# Altium PCB CS_PCB.PcbDoc
Units mil, origin at the board's own origin, x right, y up, seen from the top; angles counter-clockwise.
Board outline 2989 x 6254 mil, 2 copper layers (Top Layer, Bottom Layer); 87 components, 67 nets, 292 pads, 14 vias.
Unrouted connection lines stored in the file: 1.
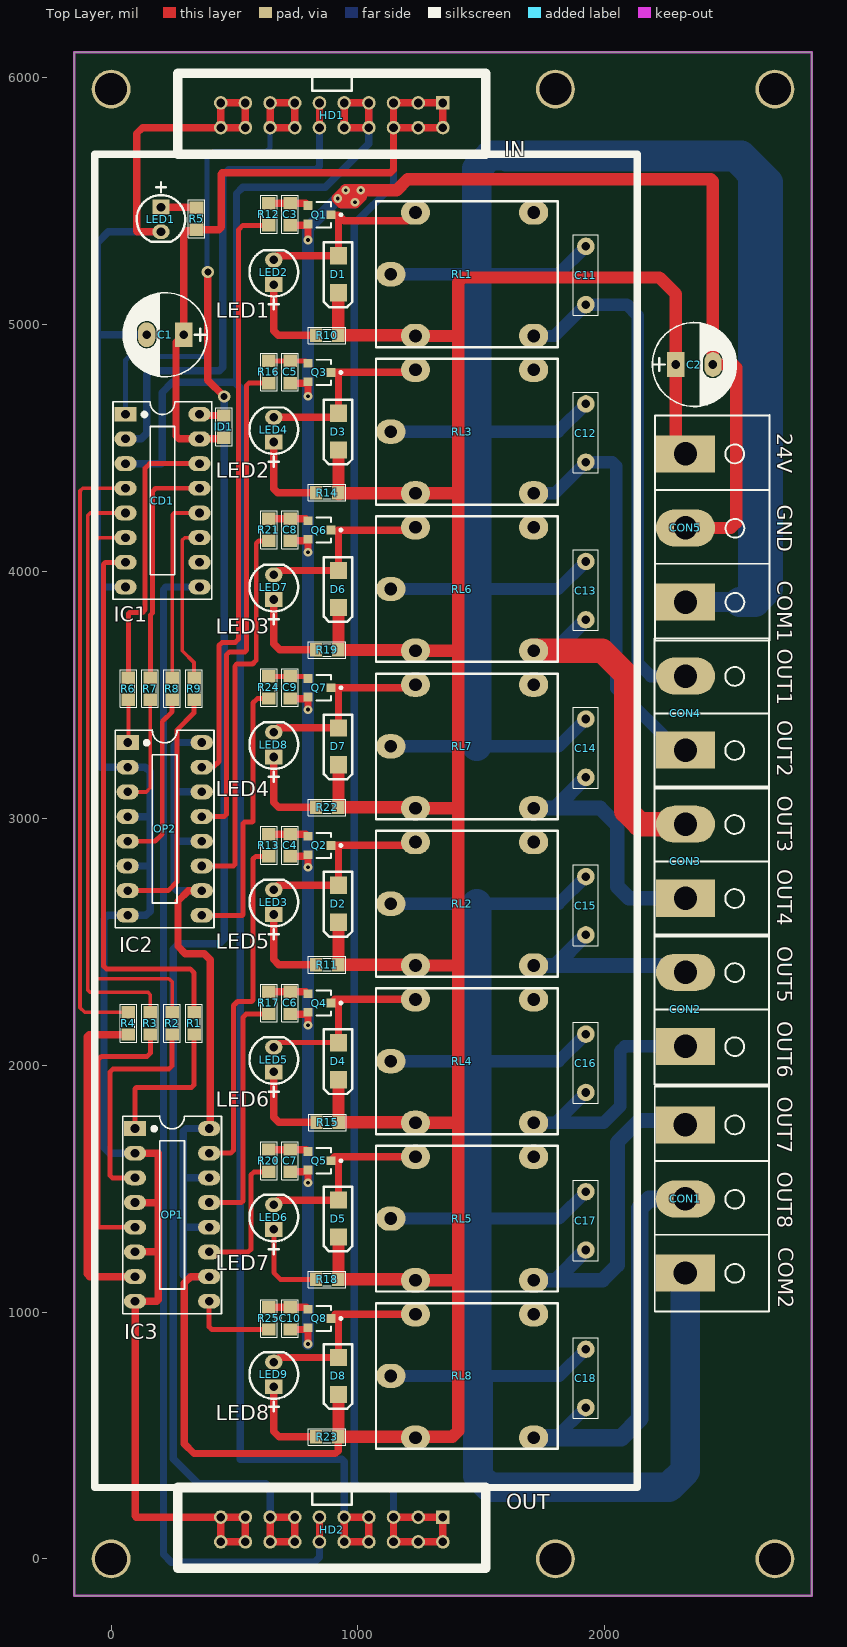
[diagram p0: Top Layer view]
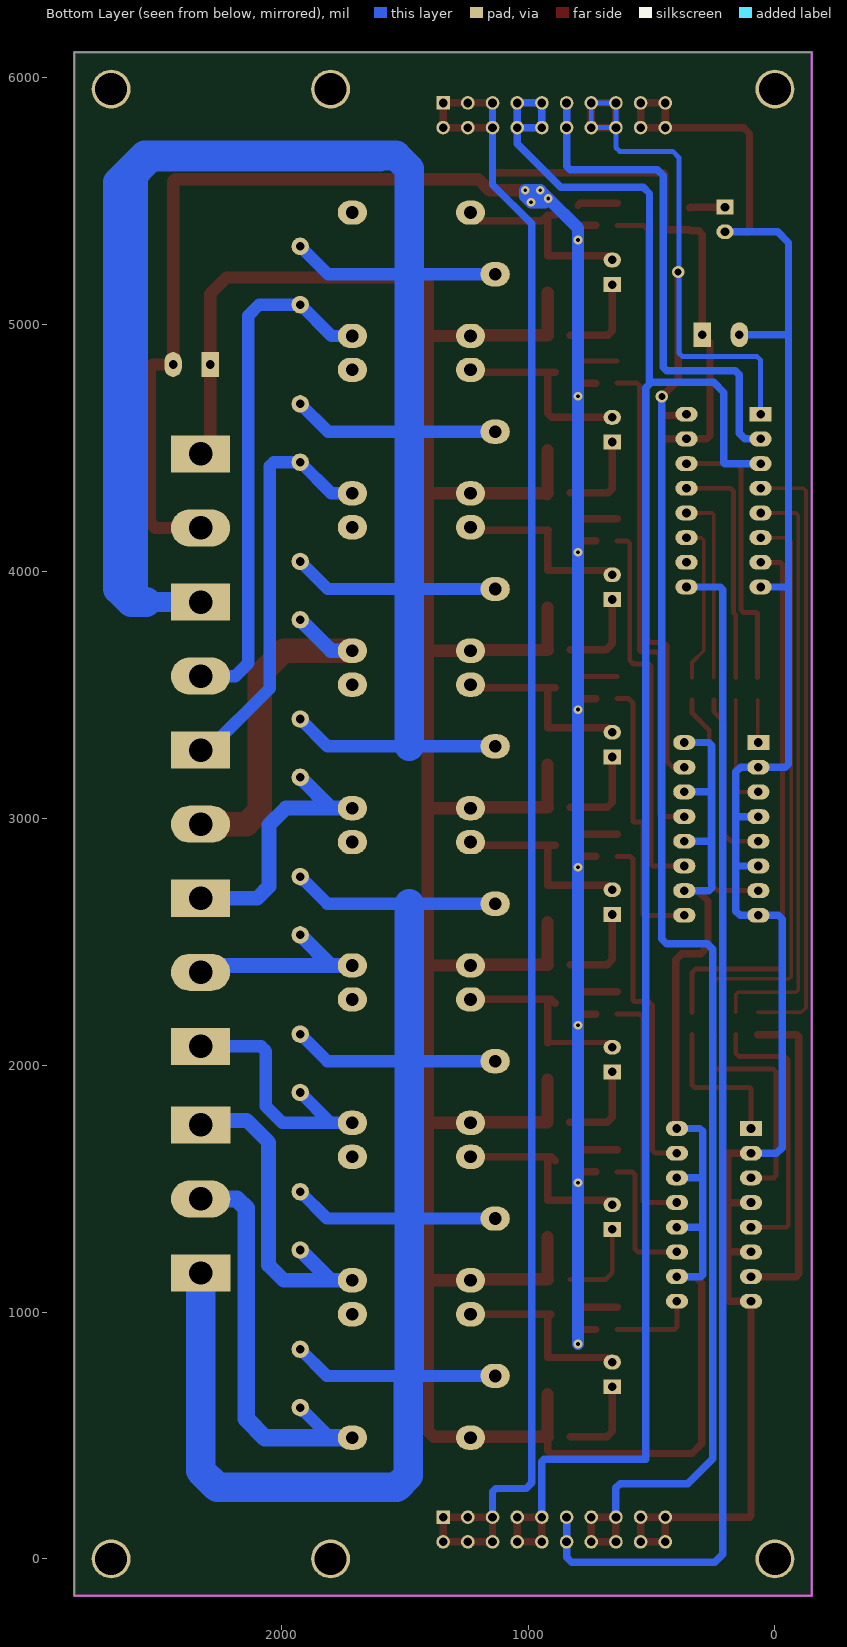
[diagram p1: Bottom Layer view, seen from below]
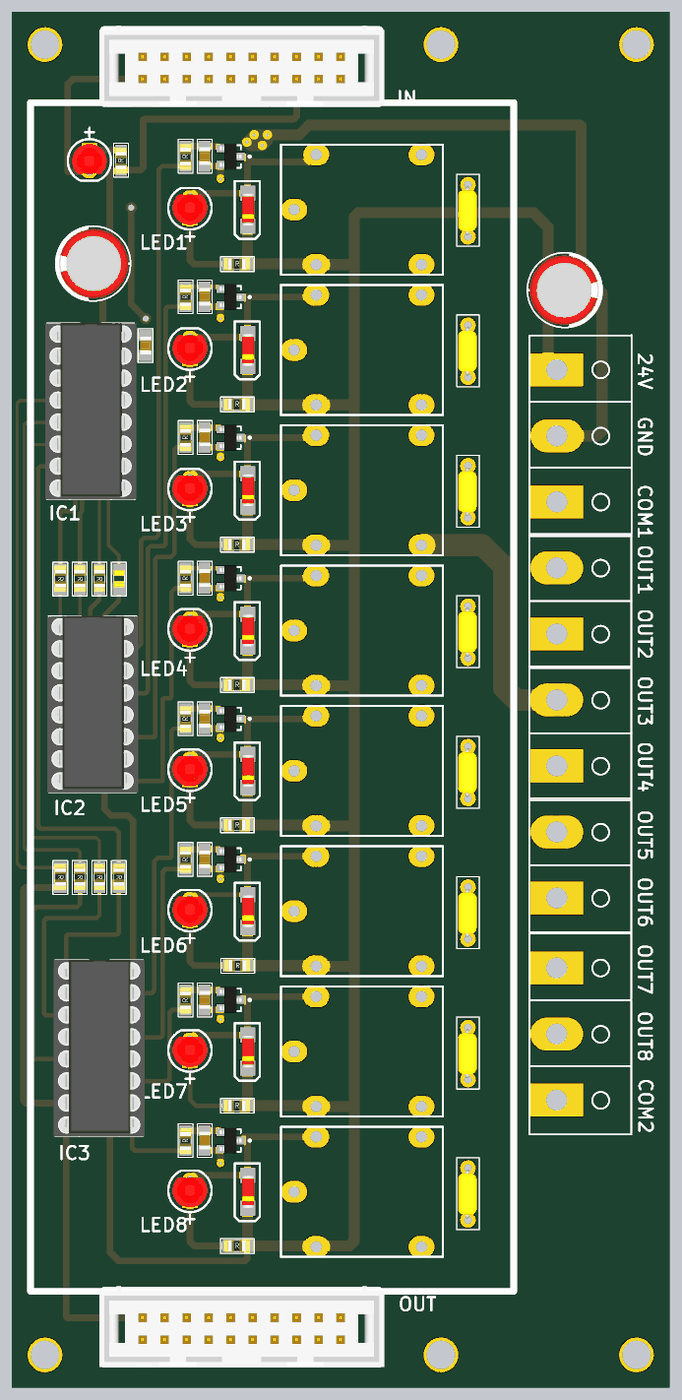
[diagram p2: 3D render of the assembled board from above, using the file's embedded part models]

## Layer stack, top to bottom
Top Solder: solder mask 0.4, Solder Resist, Dk 3.5
Top Layer: signal copper 1.4
Dielectric 1: dielectric 12.6, FR-4, Dk 4.8
Bottom Layer: signal copper 1.4
Bottom Solder: solder mask 0.4, Solder Resist, Dk 3.5

## Board outline
-150,-150 2839,-150 2839,6104 -150,6104

## Design rules (kind name [scope] priority, off if disabled: settings)
Clearance [All] p1: gap=10 except(50: Arc-Poly Track-Poly SMDPad-Poly THPad-Poly Via-Poly Fill-Poly Poly-Poly)
PolygonConnect [All] p1: connectstyle=Relief reliefconductorwidth=10 reliefentries=4 polygonreliefangle="90 Angle" airgapwidth=10
RoomDefinition relay [InComponentClass('relay')] p1: confinementstyle=ConfineIn formatcopy=TRUE lockcomponents=FALSE outline -20005,-6208 -18005,-6208 -18005,-5208 -20005,-5208
RoomDefinition CongSuat_SCH [InComponentClass('CongSuat_SCH')] p2: confinementstyle=ConfineIn formatcopy=TRUE lockcomponents=FALSE outline -20005,-6208 -18005,-6208 -18005,-5208 -20005,-5208
RoutingVias [All] p1: holewidth=28 width=50 viastyle="Through Hole" minholewidth=15 minwidth=30 maxholewidth=28 maxwidth=50
SolderMaskExpansion [All] p1: expansion=4
Width [All] p1: maxlimit=150 minlimit=10 preferedwidth=10
30 further rules are at their usual default settings.

## Classes and differential pairs
component class CongSuat_SCH: C1 C2 CD1 HD1 HD2 ID1 LED1 OP1 OP2 R1 R2 R3 R4 R5 R6 R7 R8 R9
component class relay: C3 C4 C5 C6 C7 C8 C9 C10 C11 C12 C13 C14 C15 C16 C17 C18 CON1 CON2 CON3 CON4 CON5 D1 D2 D3 D4 D5 D6 D7 D8 LED2 LED3 LED4 LED5 LED6 LED7 LED8 LED9 Q1 Q2 Q3 Q4 Q5 Q6 Q7 Q8 R10 R11 R12 R13 R14 R15 R16 R17 R18 R19 R20 R21 R22 R23 R24 R25 RL1 RL2 RL3 RL4 RL5 RL6 RL7 RL8

## Components (designator, comment, footprint, x,y, rotation, side; value= is the part's Value field where it differs from the comment)
C1 "680_uF" "TU_HOA(100uF/35V - 470uF/16V)" 219,4959 r180 top
C2 "100uF/16V" "TU_HOA(100uF/35V - 470uF/16V)" 2362.8,4838.4 r0 top
C3 "104" TU_SMD_0805 725,5447.11 r90 top
C4 "104" TU_SMD_0805 725,2891.11 r90 top
C5 "104" TU_SMD_0805 725,4808.11 r90 top
C6 "104" TU_SMD_0805 725,2252.11 r90 top
C7 "104" TU_SMD_0805 725,1613.11 r90 top
C8 "104" TU_SMD_0805 725,4169.11 r90 top
C9 "104" TU_SMD_0805 725,3530.11 r90 top
C10 "104" TU_SMD_0805 725,974.11 r90 top
C11 "TU_CAO__AP_103_102_101_1KV_MH" TU_TATA_5.08 1923,5199 r270 top
C12 "TU_CAO__AP_103_102_101_1KV_MH" TU_TATA_5.08 1923,4560.71 r270 top
C13 "TU_CAO__AP_103_102_101_1KV_MH" TU_TATA_5.08 1923,3922.43 r270 top
C14 "TU_CAO__AP_103_102_101_1KV_MH" TU_TATA_5.08 1923,3284.14 r270 top
C15 "TU_CAO__AP_103_102_101_1KV_MH" TU_TATA_5.08 1923,2645.86 r270 top
C16 "TU_CAO__AP_103_102_101_1KV_MH" TU_TATA_5.08 1923,2007.57 r270 top
C17 "TU_CAO__AP_103_102_101_1KV_MH" TU_TATA_5.08 1923,1369.29 r270 top
C18 "TU_CAO__AP_103_102_101_1KV_MH" TU_TATA_5.08 1923,731 r270 top
CD1 "CD4094" DIP16 208,4287 r270 top
CON1 "CON 3 KF762_MH" "Con 3 KF762" 2326.19,1458 r90 top
CON2 "CON 2 KF762_MH" "Con 2 KF762" 2326.8,2226.2 r90 top
CON3 "CON 2 KF762_MH" "Con 2 KF762" 2326.8,2826.2 r90 top
CON4 "CON 2 KF762_MH" "Con 2 KF762" 2326.8,3426.2 r90 top
CON5 "CON 3 KF762_MH" "Con 3 KF762" 2326.8,4176.2 r90 top
D1 "M7" SOD80 921,5204.11 r90 top
D2 "M7" SOD80 921,2653.82 r90 top
D3 "M7" SOD80 921,4566.54 r90 top
D4 "M7" SOD80 921,2016.25 r90 top
D5 "M7" SOD80 921,1378.68 r90 top
D6 "M7" SOD80 921,3928.97 r90 top
D7 "M7" SOD80 921,3291.4 r90 top
D8 "M7" SOD80 921,741.11 r90 top
HD1 "IDE 20" "CABLE 20" 1344,5898 r180 top
HD2 "IDE 20" "CABLE 20" 1344,169 r180 top
ID1 "Inductor 0805_MH" TU_SMD_0805 456,4587 r90 top
LED1 "LED3" "LED 3mm Do" 202,5426 r270 top
LED2 "LED3" "LED 3mm Do" 659,5212.11 r90 top
LED3 "LED3" "LED 3mm Do" 659,2660.62 r90 top
LED4 "LED3" "LED 3mm Do" 659,4574.24 r90 top
LED5 "LED3" "LED 3mm Do" 659,2022.75 r90 top
LED6 "LED3" "LED 3mm Do" 659,1384.87 r90 top
LED7 "LED3" "LED 3mm Do" 659,3936.36 r90 top
LED8 "LED3" "LED 3mm Do" 659,3298.49 r90 top
LED9 "LED3" "LED 3mm Do" 659,747 r90 top
OP1 "TLP521-4GB DIP16 _MH" DIP16 247,1393.5 r270 top
OP2 "TLP521-4GB DIP16 _MH" DIP16 217,2957 r270 top
Q1 "C1815" SOT23 844,5445.11 r270 top
Q2 "C1815" SOT23 844,2890.25 r270 top
Q3 "C1815" SOT23 844,4806.4 r270 top
Q4 "C1815" SOT23 844,2251.54 r270 top
Q5 "C1815" SOT23 844,1612.82 r270 top
Q6 "C1815" SOT23 844,4167.68 r270 top
Q7 "C1815" SOT23 844,3528.97 r270 top
Q8 "C1815" SOT23 844,974.11 r270 top
R1 "330" "Tro SMD 0805" 336,2169 r270 top
R2 "330" "Tro SMD 0805" 247.33,2169 r270 top
R3 "330" "Tro SMD 0805" 158.67,2169 r270 top
R4 "330" "Tro SMD 0805" 70,2169 r270 top
R5 "1K" "Tro SMD 0805" 346,5429 r90 top
R6 "330" "Tro SMD 0805" 70,3525 r270 top
R7 "330" "Tro SMD 0805" 158.67,3525 r270 top
R8 "330" "Tro SMD 0805" 247.33,3525 r270 top
R9 "330" "Tro SMD 0805" 336,3525 r270 top
R10 "2k2" "Tro SMD 0805" 875,4957 r0 top
R11 "2k2" "Tro SMD 0805" 875,2407.29 r0 top
R12 "4.7k" "Tro SMD 0805" 639,5447.11 r90 top
R13 "4.7k" "Tro SMD 0805" 639,2891.11 r90 top
R14 "2k2" "Tro SMD 0805" 875,4319.57 r0 top
R15 "2k2" "Tro SMD 0805" 877,1769 r0 top
R16 "4.7k" "Tro SMD 0805" 639,4808.11 r90 top
R17 "4.7k" "Tro SMD 0805" 639,2252.11 r90 top
R18 "2k2" "Tro SMD 0805" 875,1132.43 r0 top
R19 "2k2" "Tro SMD 0805" 875,3682.14 r0 top
R20 "4.7k" "Tro SMD 0805" 639,1613.11 r90 top
R21 "4.7k" "Tro SMD 0805" 639,4169.11 r90 top
R22 "2k2" "Tro SMD 0805" 875,3044.71 r0 top
R23 "2k2" "Tro SMD 0805" 875,495 r0 top
R24 "4.7k" "Tro SMD 0805" 639,3530.11 r90 top
R25 "4.7k" "Tro SMD 0805" 639,974.11 r90 top
RL1 "Relay 10A 5pin_MH" "relay 10A 5pin" 1422.37,5204.11 r270 top
RL2 "Relay 10A 5pin_MH" "relay 10A 5pin" 1422.37,2653.82 r270 top
RL3 "Relay 10A 5pin_MH" "relay 10A 5pin" 1422.37,4566.54 r270 top
RL4 "Relay 10A 5pin_MH" "relay 10A 5pin" 1422.37,2016.25 r270 top
RL5 "Relay 10A 5pin_MH" "relay 10A 5pin" 1422.37,1378.68 r270 top
RL6 "Relay 10A 5pin_MH" "relay 10A 5pin" 1422.37,3928.97 r270 top
RL7 "Relay 10A 5pin_MH" "relay 10A 5pin" 1422.37,3291.4 r270 top
RL8 "Relay 10A 5pin_MH" "relay 10A 5pin" 1422.37,741.11 r270 top

## Footprints (in the part's own frame and the unit in brackets; to place one, negate y for a bottom-side part, rotate by r counter-clockwise, add the part's x,y. Pads: shape width x height; smd on the part's side, far side on the other; paste and mask are expansions set on the pad)
"CABLE 20" [mm] "Connector; Header; 5x2 Position"
  rect 1.4x1.4 hole 0.889: 1(0,0)
  round 1.4 hole 0.889: 2(0,2.54) 3(2.54,0) 4(2.54,2.54) 5(5.08,0) 6(5.08,2.54) 7(7.62,0) 8(7.62,2.54) 9(10.16,0) 10(10.16,2.54) 11(12.7,0) 12(12.7,2.54) 13(15.24,0) 14(15.24,2.54) 15(17.78,0) 16(17.78,2.54) 17(20.32,0) 18(20.32,2.54) 19(22.86,0) 20(22.86,2.54)
  silkscreen extent -4.42,-3.05 27.28,5.27, body extent -5.02,-3.63 27.88,5.77, height 9.3
"Con 2 KF762" [mil]
  rect 150x240 hole 95: 1(-150,0)
  oval 150x240 hole 95: 2(150,0)
  silkscreen extent -306,-339 304,126
"Con 3 KF762" [mil]
  rect 150x240 hole 95: 1(-300,0) 3(300,0)
  oval 150x240 hole 95: 2(0,0)
  silkscreen extent -456,-340 458,124
DIP16 [mil] "16 PIN, W 300mil, Pin to pin 100mil"
  rect 60x90 hole 35: 1(-350,-150)
  oval 60x90 hole 35: 2(-250,-150) 3(-150,-150) 4(-50,-150) 5(50,-150) 6(150,-150) 7(250,-150) 8(350,-150) 9(350,150) 10(250,150) 11(150,150) 12(50,150) 13(-50,150) 14(-150,150) 15(-250,150) 16(-350,150)
  silkscreen extent -400,-200 400,200, body extent -402,-207 402,206, height 299
"LED 3mm Do" [mil] "Footprintf LED phi 3"
  rect 60x70 hole 35: 1(-50,0)
  oval 60x70 hole 35: 2(50,0)
  silkscreen extent -150,-98 90,98, body extent -77,-78 60,78, height 205
"relay 10A 5pin" [mm]
  oval 2.5x3 hole 1.3: 1(0,-7.35) 2(-6.35,7.35) 3(6.35,7.35) 4(-6.35,-4.81) 5(6.35,-4.81)
  silkscreen extent -7.49,-8.87 7.51,9.83, body extent -7.49,-8.87 7.49,9.79, height 16
SOD80 [mil]
  rect 70x70 smd: 1(74.8,0) 2(-74.8,0)
  silkscreen extent -133,-56 129,59, body extent -73,-34 73,29, height 63
SOT23 [mm] "SOT-23; 3 Leads; Body 3.1 x 2.5 mm, inc. leads (LxW max), Alternate Lead Configuration"
  rect 0.9x0.95 smd: 1(-0.95,-1.175) 2(0.95,-1.175) 3(0,1.175)
  silkscreen extent -1.3,-0.3 1.3,2.33, body extent -1.5,-1.25 1.5,1.25, height 1.05
"Tro SMD 0805" [mil]
  rect 50x55 smd: 1(-45,0) 2(45,0)
  silkscreen extent -77,-34 76,33, body extent -62,-28 56,27, height 21
"TU_HOA(100uF/35V - 470uF/16V)" [mil]
  rect 70x100 hole 35: 1(-75,0)
  oval 70x100 hole 35: 2(75,0)
  silkscreen extent -170,-170 170,170, body extent -160,-157 155,157, height 446
TU_SMD_0805 [mil]
  rect 50x55 smd: 1(-45,0) 2(45,0)
  silkscreen extent -77,-34 76,33, body extent -40,-27 40,23, height 24
TU_TATA_5.08 [mm]
  round 1.8 hole 0.889: 1(-3,0) 2(3,0)
  silkscreen extent -4.2,-1.3 4.1,1.3, body extent -2.79,-1.16 2.79,1, height 6.27

## Part data
C1: library part TU_HOA_680_uF_25V_MH, "TU_HOA_680_uF_25V"
C2: library part TU_HOA_100uF_50V_MH, "TU_HOA_100uF_50V"
C3 C4 C5 C6 C7 C8 C9 C10: library part TU_SMD_0805_MH
C11 C12 C13 C14 C15 C16 C17 C18: "103 1KV"
CON1 CON5: "CON 3 KF762 - 3P 7.62mm"
CON2 CON3 CON4: "CON 2 KF762 - 2P 7.62mm"
D1 D2 D3 D4 D5 D6 D7 D8: library part "Diode 1N4148 SOD80 450mA 100V ( LL34 1N4148 SMD)_MH", "Diode 1N4148 SOD80 450mA 100V ( LL34 1N4148 SMD)"
HD1 HD2: "IDE header 20P"
ID1: "cuon cam 0805"
LED1 LED2 LED3 LED4 LED5 LED6 LED7 LED8 LED9: library part "LED 3mm_MH", "LED 3mm"
Q1 Q2 Q3 Q4 Q5 Q6 Q7 Q8: library part "C1815 SOT23 TRANS NPN 0.15A 50V (SMD-HF)_MH"
R1 R2 R3 R4 R5 R6 R7 R8 R9 R10 R11 R12 R13 R14 R15 R16 R17 R18 R19 R20 R21 R22 R23 R24 R25: library part TRO_SMD_0805_MH, "TRO_SMD_0805"
RL1 RL2 RL3 RL4 RL5 RL6 RL7 RL8: "Relay"

## Free pads (board coordinates)
  round 157.48 hole 129.92: 2(0,0) 3(1800,0) 4(2689,0) 5(2689,5954) 6(1800,5954) 7(0,5954)

## Via types
v1: diameter 35, hole 15, Top Layer to Bottom Layer, 12 vias
v2: diameter 50, hole 28, Top Layer to Bottom Layer, tented both sides, 2 vias

## Nets (pads, with @x,y where several pads share a name; then routed paths per layer and width w, separated by ;. In a path a pad name is that pad's centre, name@x,y a point inside that pad or via, vN(x,y) a via of type N, cw(c..) or ccw(c..) an arc to the next point about the centre after c; other vN are vias at no path point)
5V: C1.1 CD1.15 HD1.1 HD1.2 HD1.3 HD1.4 HD1.5 HD1.6 HD2.1 HD2.2 HD2.3 HD2.4 HD2.5 HD2.6 ID1.1 R5.1 | length 9416.5
  Top Layer w30: ID1.1 451,4537 CD1.15 276,4537 263,4550 263,4928 C1.1 294,5365 309,5380 342,5380 R5.1 436,5384 446,5394 446,5610 451,5615 1131,5615 1144,5628 HD1.6 ; HD1.6 HD1.5 HD1.3 HD1.1 HD1.2 HD1.4 HD1.6 ; HD2.6 HD2.5 HD2.3 HD2.1 HD2.2 HD2.4 HD2.6
  Bottom Layer w30: HD2.5 1144,272 1131,285 1008,285 985,308 985,5408 1144,5567 HD1.6 HD1.5
24V: C2.1 CON5.3 D1.2 D2.2 D3.2 D4.2 D5.2 D6.2 D7.2 D8.2 OP1.10 OP1.12 OP1.14 OP1.16 OP2.10 OP2.12 OP2.14 OP2.16 R10.2 R11.2 R14.2 R15.2 R18.2 R19.2 R22.2 R23.2 RL1.5 RL2.5 RL3.5 RL4.5 RL5.5 RL6.5 RL7.5 RL8.5 | length 16163.1
  Top Layer w30: OP2.10 313,2707 271,2665 271,2481 301,2451 377,2451 401,2427 401,1747.5 OP1.16 ; OP1.10 321.8,1143.5 295.9,1117.6 295.9,466.8 335.8,426.9 909,426.9 920,437.9 R23.2
  Top Layer w50: R14.2 921,4320.57 D3.2 ; D8.2 921,496 R23.2 1383,495 1406,518 1406,1123 ; D5.2 921,1133.43 R18.2 1229.25,1132.43 RL5.5 1400.32,1128.68 1406,1123 ; D4.2 921,1770 R15.2 1230.25,1769 RL4.5 1404.75,1766.25 1406,1765 ; D2.2 921,2408.29 R11.2 1229.54,2407.29 RL2.5 1403.82,2403.82 1406,2406 ; D7.2 921,3045.71 R22.2 1229.68,3044.71 RL7.5 1396.6,3041.4 1406,3032 ; D6.2 921,3683.14 R19.2 1229.82,3682.14 RL6.5 1392.03,3678.97 1406,3665 ; D1.2 920,5128.31 R10.2 1230.11,4957 RL1.5 1400,4954.11 ; R14.2@923,4312 927.54,4316.54 RL3.5 1401.54,4316.54 1406,4321 ; CON5.3 2287.8,4515.2 C2.1 2287.8,5124.2 2221,5191 1426,5191 1406,5171 1406,4321 ; 1406,1123 1406,1765 ; 1406,1765 1406,2406 ; 1406,2406 1406,3032 ; 1406,3032 1406,3665 ; 1406,3665 1406,4321
  Bottom Layer w30: OP2.10 267,2707 256,2718 256,2904 ; OP2.12 259,2907 256,2904 ; OP2.14 257,3107 256,3108 ; OP2.16 268,3307 256,3295 256,3108 ; OP1.10 300.5,1143.5 293,1151 293,1343 ; OP1.12 293.5,1343.5 293,1343 ; OP1.14 293.5,1543.5 293,1544 ; OP1.16 303.5,1743.5 293,1733 293,1544 ; 256,2904 256,3108 ; 293,1343 293,1544
CD_CLK: CD1.3 HD1.7 HD1.8 HD1.9 HD1.10 HD2.7 HD2.8 HD2.9 HD2.10 | length 8410.4
  Top Layer w30: HD2.10 HD2.9 HD2.7 HD2.8 HD2.10 ; HD1.10 HD1.9 HD1.7 HD1.8 HD1.10
  Bottom Layer w30: CD1.3 203,4437 207,4441 207,4725 248,4766 501,4766 508,4759 ; HD2.9 944,393 934,403 523,403 523,4744 508,4759 ; HD1.8@1031,5798 HD1.10 HD1.9 HD1.7 HD1.8 1044,5733.2 866.8,5556 533,5556 508,5531 508,4759
CD_DATA: CD1.2 HD1.11 HD1.12 | length 2193.7
  Top Layer w30: HD1.12 HD1.11
  Bottom Layer w30: CD1.2 122,4537 145,4560 145,4797 161,4813 438,4813 453,4828 453,5604 476,5627 830,5627 844,5641 HD1.12 HD1.11
CD_O1: CD1.4 R4.1 | length 2485.4
  Top Layer w15: CD1.4 -115,4337 -126,4326 -126,2233 -107,2214 R4.1
CD_O2: CD1.5 R3.1 | length 2412.9
  Top Layer w15: CD1.5 -85,4237 -95,4227 -95,2304 -86,2295 149,2295 158.67,2285.33 R3.1
CD_O3: CD1.6 R2.1 | length 2338.5
  Top Layer w15: CD1.6 -50,4137 -66,4121 -66,2358 -58,2350 234,2350 247.33,2336.67 R2.1
CD_O4: CD1.7 R1.1 | length 2257.9
  Top Layer w20: CD1.7 -23,4037 -31,4029 -31,2402 -19,2390 320,2390 336,2374 R1.1
CD_O5: CD1.14 R6.1 | length 1135.1
  Top Layer w20: R6.1 70,3829 75,3834 127,3834 138,3845 138,4419 156,4437 CD1.14
CD_O6: CD1.13 R7.1 | length 953.8
  Top Layer w20: R7.1 158.67,3823.24 168,3832.57 168,4325 180,4337 CD1.13
CD_O7: CD1.12 R8.1 | length 773.8
  Top Layer w15: R8.1 247.33,4230.33 254,4237 CD1.12
CD_O8: CD1.11 R9.1 | length 651
  Top Layer w15: R9.1 336,3631 288,3679 288,4127 298,4137 CD1.11
CD_OUT_DATA: CD1.9 HD2.11 HD2.12 | length 4975.7
  Top Layer w30: HD2.12 HD2.11
  Bottom Layer w30: CD1.9 222,3937 212,3927 212,18 244,-14 824,-14 844,6 HD2.12 HD2.11
CD_STB: CD1.1 HD1.13 HD1.14 HD1.15 HD1.16 HD2.13 HD2.14 HD2.15 HD2.16 | length 8478.1
  Top Layer w30: v2(392,5213) 392,4775 v2(458,4709) ; HD2.16 HD2.15 736,169 744,161 HD2.14 HD2.16 ; HD1.16 HD1.15 HD1.13 HD1.14 HD1.16
  Bottom Layer w20: CD1.1 58,4856 72,4870 374,4870 389,4885 389,5677 414,5702 629,5702 644,5717 HD1.16 ; HD1.16 HD1.15 HD1.13 HD1.14 HD1.16
  Bottom Layer w30: v2(458,4709) 458,2511 439,2492 274,2492 252,2470 252,406 353,305 627,305 644,288 HD2.15
COM: C11.1 C12.1 C13.1 C14.1 C15.1 C16.1 C17.1 C18.1 CON1.1 CON5.1 RL1.1 RL2.1 RL3.1 RL4.1 RL5.1 RL6.1 RL7.1 RL8.1 | length 18979.6
  Bottom Layer w50: RL8.1 1486,741.11 1815,741.11 C18.1 ; RL5.1 1481,1378.68 1558,1378.68 ; RL4.1 1481,2016.25 1558,2016.25 ; RL2.1 1481,2653.82 1558,2653.82 ; RL7.1 1481,3291.4 1558,3291.4 ; RL6.1 1481,3928.97 1558,3928.97 ; RL3.1 1481,4566.54 1810.71,4566.54 C12.1 ; RL1.1 1481,5204.11 1810,5204.11 C11.1 ; 1564,1378.68 1814.29,1378.68 C17.1 ; 1564,2016.25 1813.57,2016.25 C16.1 ; 1564,2653.82 1812.86,2653.82 C15.1 ; 1564,3291.4 1812.14,3291.4 C14.1 ; 1564,3928.97 1811.43,3928.97 C13.1
  Bottom Layer w80: 1598.7,5660.9 2518.6,5660.9 2565.9,5613.6 ; CON5.1 2546.1,3876.2 2578.7,3908.8 2578.7,5600.8
  Bottom Layer w120: 1481,2653.82 1481,2016.25 1481,1378.68 1481,746.11 1486,741.11 1486,336 1532,290 2259,290 2326.19,357.19 CON1.1 ; 1481,3291.4 1481,3928.97 1481,4566.54 1481,5204.11 1481,5631 1535,5685 2553,5685 2661,5577 2661,3929 2608.2,3876.2 2546.1,3876.2
GND: C1.2 CD1.8 HD1.17 HD1.18 HD1.19 HD1.20 HD2.17 HD2.18 HD2.19 HD2.20 LED1.2 OP1.2 OP1.4 OP1.6 OP1.8 OP2.2 OP2.4 OP2.6 OP2.8 | length 8777.2
  Top Layer w30: OP1.6 187,1243.5 190.5,1247 ; OP1.4 190,1443.5 190.5,1443 ; OP1.2 190.5,1643.5 190.5,1443 ; LED1.2 106,5376 103,5379 103,5774 127,5798 HD1.20 ; 190.5,1247 190.5,1049.5 184.5,1043.5 OP1.8 97,174 102,169 HD2.19 ; 190.5,1247 190.5,1443 ; HD2.19 HD2.17 HD2.18 HD2.20 HD2.19 ; HD1.20 HD1.19 HD1.17 HD1.18 HD1.20
  Bottom Layer w30: CD1.8 -43,3937 -55,3925 ; OP2.6 156,2807 158,2805 ; OP2.4 158,3007 ; OP1.2 -6.5,1643.5 -29,1666 -29,2592 -14,2607 OP2.8 141,2607 158,2624 158,2805 ; C1.2 -53,4959 -55,4957 ; LED1.2 -11,5376 -55,5332 -55,4957 ; -55,3925 -55,3219 -43,3207 OP2.2 139,3207 158,3188 158,3007 ; -55,3925 -55,4957 ; 158,2805 158,3007
GND_FDD: C2.2 C3.1 C4.1 C5.1 C6.1 C7.1 C8.1 C9.1 C10.1 CON5.2 Q1.2 Q2.2 Q3.2 Q4.2 Q5.2 Q6.2 Q7.2 Q8.2 | length 9356.7
  Top Layer w30: C10.1 790.14,929.11 Q8.2 v1(797.74,870.46) ; C7.1 790.43,1568.11 Q5.2 v1(797.74,1523.96) ; C6.1 790.71,2207.11 Q4.2 v1(797.74,2161.24) ; C4.1 791,2846.11 Q2.2 v1(797.74,2801.86) ; C9.1 791.28,3485.11 Q7.2 v1(797.74,3440.44) ; C8.1 791.57,4124.11 Q6.2 v1(797.74,4078.44) ; C5.1 791.86,4763.11 Q3.2 v1(797.74,4709.36) ; C3.1 792.14,5402.11 Q1.2 v1(797.74,5342.64)
  Top Layer w50: CON5.2 2510.2,4176.2 2532,4198 2532,4826 2519.6,4838.4 C2.2 2437.8,5580.2 2429,5589 1201,5589 1156,5544 v1(1011,5544) ; v1(1011,5544) v1(951,5544) v1(918,5511) 933,5496 v1(988,5496) 1011,5519 v1(1011,5544)
  Bottom Layer w50: v1(797.74,870.46) v1(797.74,1523.96) v1(797.74,2161.24) v1(797.74,2801.86) v1(797.74,3440.44) v1(797.74,4078.44) v1(797.74,4709.36) v1(797.74,5342.64) 797.74,5390.74 v1(918,5511) ; v1(918,5511) 933,5496 v1(988,5496) 1011,5519 v1(1011,5544) v1(951,5544) v1(918,5511)
NetC3_2: C3.2 Q1.1 R12.2 | length 162.7
  Top Layer w30: R12.2 C3.2 788.14,5492.11 Q1.1
NetC4_2: C4.2 Q2.1 R13.2 | length 162.2
  Top Layer w30: R13.2 C4.2 789.28,2936.11 Q2.1
NetC5_2: C5.2 Q3.1 R16.2 | length 162.6
  Top Layer w20: R16.2 C5.2 788.43,4853.11 Q3.1
NetC6_2: C6.2 Q4.1 R17.2 | length 162.1
  Top Layer w30: R17.2 C6.2 789.57,2297.11 Q4.1
NetC7_2: C7.2 Q5.1 R20.2 | length 162
  Top Layer w30: R20.2 C7.2 789.86,1658.11 Q5.1
NetC8_2: C8.2 Q6.1 R21.2 | length 162.5
  Top Layer w30: R21.2 C8.2 788.71,4214.11 Q6.1
NetC9_2: C9.2 Q7.1 R24.2 | length 162.4
  Top Layer w20: R24.2 C9.2 789,3575.11 Q7.1
NetC10_2: C10.2 Q8.1 R25.2 | length 161.9
  Top Layer w30: R25.2 C10.2 790.14,1019.11 Q8.1
NetCD1_16: CD1.16 ID1.2 | length 107.1
  Top Layer w30: CD1.16 363,4632 ID1.2
  Bottom Layer w30: CD1.16@353,4632 CD1.16
NetD1_1: D1.1 LED2.2 Q1.3 RL1.4 | length 800.6
  Top Layer w30: LED2.2 675.8,5278.91 D1.1 921,5444.11 ; Q1.3 891.26,5444.11 921,5444.11 ; RL1.4 1199.89,5421 944.11,5421 921,5444.11
NetD2_1: D2.1 LED3.2 Q2.3 RL2.4 | length 781.5
  Top Layer w30: LED3.2 677.01,2728.63 D2.1 921,2885.25 926,2890.25 ; Q2.3 926,2890.25 ; RL2.4 1219.43,2890.25 926,2890.25
NetD3_1: D3.1 LED4.2 Q3.3 RL3.4 | length 783.6
  Top Layer w30: LED4.2 903.9,4624.24 D3.1 921,4800.4 927,4806.4 ; Q3.3 927,4806.4 ; RL3.4@1222.86,4806.4 927,4806.4
  Top Layer w50: RL3.4@1222.86,4806.4 RL3.4
NetD4_1: D4.1 LED5.2 Q4.3 RL4.4 | length 795.7
  Top Layer w20: LED5.2 677.31,2091.06 D4.1
  Top Layer w30: Q4.3 904.97,2266.25 926,2266.25 ; D4.1 921,2261.25 926,2266.25 ; RL4.4 926,2266.25
NetD5_1: D5.1 LED6.2 Q5.3 RL5.4 | length 796.3
  Top Layer w30: LED6.2 677.61,1453.48 D5.1 921,1623.68 926,1628.68 ; Q5.3 906.12,1628.68 926,1628.68 ; RL5.4 926,1628.68
NetD6_1: D6.1 LED7.2 Q6.3 RL6.4 | length 754
  Top Layer w30: LED7.2 676.41,4003.77 D6.1 921,4164.68 918,4167.68 1221.71,4167.68 RL6.4
NetD7_1: D7.1 LED8.2 Q7.3 RL7.4 | length 780.8
  Top Layer w30: LED8.2 676.71,3366.2 D7.1 921,3526.97 919,3528.97 ; Q7.3 919,3528.97 ; RL7.4 1220.57,3528.97 919,3528.97
NetD8_1: D8.1 LED9.2 Q8.3 RL8.4 | length 776.5
  Top Layer w30: LED9.2 677.91,815.91 D8.1 921,977.37 907.26,991.11 RL8.4
NetLED1_1: LED1.1 R5.2 | length 144.8
  Top Layer w30: LED1.1 344,5476 R5.2
NetLED2_1: LED2.1 R10.1 | length 365.6
  Top Layer w30: LED2.1 659,4975 677,4957 R10.1
NetLED3_1: LED3.1 R11.1 | length 362.2
  Top Layer w30: LED3.1 659,2428 679.71,2407.29 R11.1
NetLED4_1: LED4.1 R14.1 | length 366.6
  Top Layer w30: LED4.1 659,4335 674.43,4319.57 R14.1
NetLED5_1: LED5.1 R15.1 | length 365
  Top Layer w30: LED5.1 659,1789 679,1769 R15.1
NetLED6_1: LED6.1 R18.1 | length 357.9
  Top Layer w20: LED6.1 659,1159 685.57,1132.43 R18.1
NetLED7_1: LED7.1 R19.1 | length 360.7
  Top Layer w30: LED7.1 659,3707 683.86,3682.14 R19.1
NetLED8_1: LED8.1 R22.1 | length 363.5
  Top Layer w30: LED8.1 659,3064 678.29,3044.71 R22.1
NetLED9_1: LED9.1 R23.1 | length 360.7
  Top Layer w30: LED9.1 659,516 680,495 R23.1
NetOP1_1: OP1.1 R1.2 | length 610.1
  Top Layer w20: OP1.1 97,1904 103,1910 326,1910 336,1920 R1.2
NetOP1_3: OP1.3 R2.2 | length 913.6
  Top Layer w20: OP1.3 4.5,1543.5 -4,1552 -4,1973 8,1985 235,1985 247.33,1997.33 R2.2
NetOP1_5: OP1.5 R3.2 | length 1123.6
  Top Layer w20: OP1.5 -46.5,1343.5 -54,1351 -54,2021 -39,2036 146,2036 158.67,2048.67 R3.2
NetOP1_7: OP1.7 R4.2 | length 1330.1
  Top Layer w30: R4.2 -88,2124 -97,2115 -97,1154 -86.5,1143.5 OP1.7
NetOP2_1: OP2.1 R6.2 | length 174.2
  Top Layer w15: OP2.1 70,3310 R6.2
NetOP2_3: OP2.3 R7.2 | length 454.9
  Top Layer w15: OP2.3 142,3107 158.67,3123.67 R7.2
NetOP2_5: OP2.5 R8.2 | length 712.7
  Top Layer w20: OP2.5 178,2907 207,2936 207,3392 247.33,3432.33 R8.2
NetOP2_7: OP2.7 R9.2 | length 980.5
  Top Layer w20: OP2.7 231,2707 266,2742 266,3357 336,3427 R9.2
OUT1: C11.2 CON4.2 RL1.3 | length 2115.6
  Bottom Layer w50: RL1.3 1796.22,4954.11 C11.2 2089.11,5080.89 2133,5037 2133,3629 2185.8,3576.2 CON4.2
OUT2: C12.2 CON4.1 RL3.3 | length 1677.6
  Bottom Layer w50: RL3.3 1796.93,4316.54 C12.2 2030.4,4442.6 2046,4427 2046,3527 2296.8,3276.2 CON4.1
OUT3: C13.2 CON3.2 RL6.3 | length 1492.1
  Top Layer w100: RL6.3 1989.03,3678.97 2087,3581 2087,3030 2140.8,2976.2 CON3.2
  Bottom Layer w60: RL6.3 1797.65,3678.97 C13.2
OUT4: C14.2 CON3.1 RL7.3 | length 1088.5
  Bottom Layer w60: RL7.3 1798.36,3041.4 ; C14.2 1798.36,3041.4 ; CON3.1 2097.8,2676.2 2050,2724 2050,2973 1981.6,3041.4 1798.36,3041.4
OUT5: C15.2 CON2.2 RL2.3 | length 801.8
  Bottom Layer w60: RL2.3 1799.08,2403.82 ; C15.2 1799.08,2403.82 ; CON2.2 2299.18,2403.82 1799.08,2403.82
OUT6: C16.2 CON2.1 RL4.3 | length 1048.9
  Bottom Layer w50: RL4.3 1799.79,1766.25 ; C16.2 1799.79,1766.25 ; CON2.1 2081.2,2076.2 2062,2057 2062,1833 1995.25,1766.25 1799.79,1766.25
OUT7: C17.2 CON1.3 RL5.3 | length 1347.8
  Bottom Layer w60: RL5.3 1800.51,1128.68 ; C17.2 1800.51,1128.68 ; CON1.3@2326.8,1776.2 2140.2,1776.2 2051,1687 2051,1189.68 1990,1128.68 1800.51,1128.68
OUT8: C18.2 CON1.2 RL8.3 | length 1705
  Bottom Layer w50: 1801.22,491.11 C18.2
  Bottom Layer w70: RL8.3 1801.22,491.11 2066,491.11 2142,567.11 2142,1420 2180,1458 CON1.2 ; CON1.2@2326.8,1458 CON1.2@2326.8,1476.2
OUT_OT1: OP2.15 R12.1 | length 2428.4
  Top Layer w20: OP2.15 414,3207 437,3230 437,3700 450,3713 503,3713 516,3726 516,5385 533.11,5402.11 R12.1
OUT_OT2: OP2.13 R16.1 | length 2006.4
  Top Layer w20: OP2.13 458,3007 467,3016 467,3662 479,3674 542,3674 549,3681 549,4754 558.11,4763.11 R16.1
OUT_OT3: OP2.11 R21.1 | length 1565.6
  Top Layer w20: OP2.11 495,2807 501,2813 501,3616 510,3625 573,3625 588,3640 588,4114 598.11,4124.11 R21.1
OUT_OT4: OP2.9 R24.1 | length 1133.6
  Top Layer w20: OP2.9 532,2607 535,2610 535,2980 539.5,2984.5 571.5,2984.5 574,2987 574,3467 592.11,3485.11 R24.1
OUT_OT5: OP1.15 R13.1 | length 1418.5
  Top Layer w20: OP1.15 484.5,1643.5 496,1655 496,2242 512,2258 569,2258 575,2264 575,2835 586.11,2846.11 R13.1
OUT_OT6: OP1.13 R17.1 | length 994.1
  Top Layer w20: OP1.13 527.5,1443.5 534,1450 534,2194 547.11,2207.11 R17.1
OUT_OT7: OP1.11 R20.1 | length 552.8
  Top Layer w20: OP1.11 555.5,1243.5 566,1254 566,1555 579.11,1568.11 R20.1
OUT_OT8: OP1.9 R25.1 | length 350
  Top Layer w20: OP1.9 397,940 407.89,929.11 R25.1
pads on no net: CD1.10 RL1.2 RL2.2 RL3.2 RL4.2 RL5.2 RL6.2 RL7.2 RL8.2

## Keep-outs
Keep-Out Layer:
  the board outline again, w10

## Silkscreen, mask and mechanical layers (free items; w line width, h text height)
Top Overlay:
  lines w30: 269.98,289 -66,289 -66,5690.52 269.98,5690.52 ; 1518.02,289 2131,289 2131,5690.52 1518.02,5690.52
  text "IN" at 1593,5682 h60
  text "LED1" at 423,5027 h60
  text "24V" at 2698,4560 h60 r270
  text "LED2" at 423,4380 h60
  text "GND" at 2698,4270.4 h60 r270
  text "COM1" at 2698,3961.66 h60 r270
  text "IC1" at 11,3796 h60
  text "LED3" at 423,3747 h60
  text "OUT1" at 2698,3686.91 h60 r270
  text "OUT2" at 2698,3396.45 h60 r270
  text "OUT3" at 2698,3091.71 h60 r270
  text "LED4" at 423,3089 h60
  text "OUT4" at 2698,2792.68 h60 r270
  text "OUT5" at 2698,2482.22 h60 r270
  text "LED5" at 423,2472 h60
  text "IC2" at 33,2457 h60
  text "OUT6" at 2698,2177.48 h60 r270
  text "OUT7" at 2698,1872.74 h60 r270
  text "LED6" at 423,1832 h60
  text "OUT8" at 2698,1568 h60 r270
  text "COM2" at 2702,1262.66 h60 r270
  text "LED7" at 423,1169 h60
  text "IC3" at 54,889 h60
  text "LED8" at 423,562 h60
  text "OUT" at 1601,202 h60
Bottom Solder:
  lines w50: 1480,2618 1478,399 1478,346 ccw(c1528,346) 1528,296 2265,296 2325,356 2325,1156.81 2326.19,1158 ; 1486,3299 1486,5648 1512,5674 2545,5674 2626,5593 2626,3932 2570.2,3876.2 2326.8,3876.2